# EAGLE board main_improved (EAGLE 9.2.2)
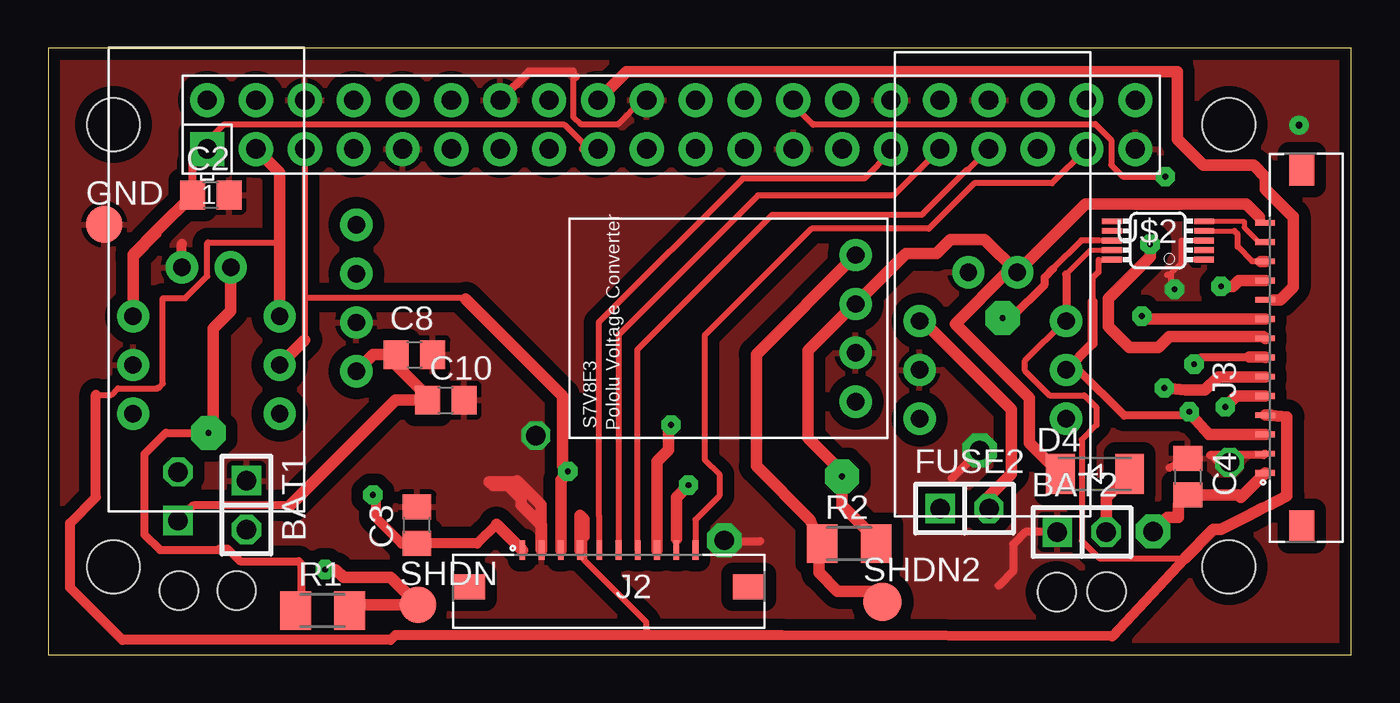
[diagram p0: board, top side]
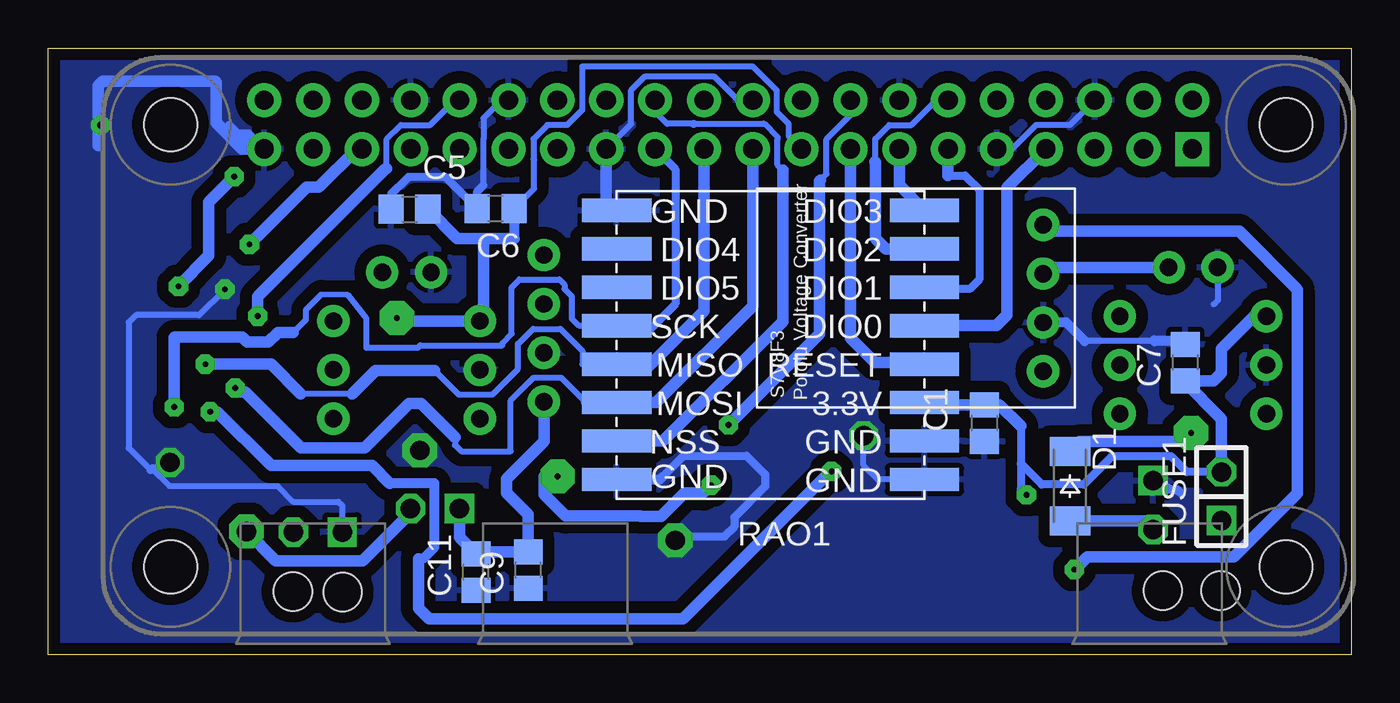
[diagram p1: board, bottom side, seen from below]

Size 67.77 x 31.55 mm. Coordinates in mm from the lower left corner, seen from the top.
Outline: 0,0 67.77,0 67.77,31.55 0,31.55 0,0
Copper layers (1*16): Top 0.035mm / dielectric 1.5mm / Bottom 0.035mm
Design rules "default *": minimum track width 8mil, minimum drill 0.3mm, track to track 8mil, track to pad 8mil, pad to pad 8mil, via to via 8mil, smd to smd 8mil, copper to edge 10mil, drill to drill 8mil, minimum pad ring 10mil, minimum via ring 8mil, stop-mask expansion 4mil, vias tented up to drill 0mil, thermal gap 10mil
Holes 2 mm at 52.45,3.25 55.04,3.28 6.81,3.33 9.8,3.33

## Footprints (pad centres in the part's own frame; a part is rotated, then mirrored left to right if it is on the bottom)
1X02 = drill 1.016 square: 1 -1.27,0 | drill 1.016 octagon: 2 1.27,0
C0805 = smd 1.3 x 1.5: 1 -0.95,0; 2 0.95,0
SOD-123_MINI-SMA = smd 1.5 x 2.1: A 1.8,0; C -1.8,0
TP19R = smd 1.9 x 1.9: TP 0,0
686110183522 = smd 0.3 x 1: 1 -4.5,1.9; 2 -3.5,1.9; 3 -2.5,1.9; 4 -1.5,1.9; 5 -0.5,1.9; 6 0.5,1.9; 7 1.5,1.9; 8 2.5,1.9; 9 3.5,1.9; 10 4.5,1.9 | smd 1.65 x 1.3: Z1 -7.275,0; Z2 7.275,0
686114183522 = smd 0.3 x 1: 1 -6.5,1.9; 2 -5.5,1.9; 3 -4.5,1.9; 4 -3.5,1.9; 5 -2.5,1.9; 6 -1.5,1.9; 7 -0.5,1.9; 8 0.5,1.9; 9 1.5,1.9; 10 2.5,1.9; 11 3.5,1.9; 12 4.5,1.9; 13 5.5,1.9; 14 6.5,1.9 | smd 1.65 x 1.3: Z1 -9.275,0; Z2 9.275,0
M1206 = smd 1.6 x 2: 1 -1.4,0; 2 1.4,0
LORA-RA2-SMD = smd 3.6 x 1.2: 1 -8,7; 2 -8,5; 3 -8,3; 4 -8,1; 5 -8,-1; 6 -8,-3; 7 -8,-5; 8 -8,-7; 9 8,-7; 10 8,-5; 11 8,-3; 12 8,-1; 13 8,1; 14 8,3; 15 8,5; 16 8,7
RASPBERRYPI_BASTELSTUBE_V13_RASPI_BOARD_B+_FULL = drill 1 pad 1.778 square: 1 8.37,25.23 | drill 1 pad 1.778: 2 8.37,27.77; 3 10.91,25.23; 4 10.91,27.77; 5 13.45,25.23; 6 13.45,27.77; 7 15.99,25.23; 8 15.99,27.77; 9 18.53,25.23; 10 18.53,27.77; 11 21.07,25.23; 12 21.07,27.77; 13 23.61,25.23; 14 23.61,27.77; 15 26.15,25.23; 16 26.15,27.77; 17 28.69,25.23; 18 28.69,27.77; 19 31.23,25.23; 20 31.23,27.77; 21 33.77,25.23; 22 33.77,27.77; 23 36.31,25.23; 24 36.31,27.77; 25 38.85,25.23; 26 38.85,27.77; 27 41.39,25.23; 28 41.39,27.77; 29 43.93,25.23; 30 43.93,27.77; 31 46.47,25.23; 32 46.47,27.77; 33 49.01,25.23; 34 49.01,27.77; 35 51.55,25.23; 36 51.55,27.77; 37 54.09,25.23; 38 54.09,27.77; 39 56.63,25.23; 40 56.63,27.77 | hole 2.75: 3.5,3.5; 3.5,26.5; 61.5,3.5; 61.5,26.5
S7V8F3 = drill 0.9 pad 1.676: GND -1.27,-6.35; SHDN 3.81,-6.35; VIN 1.27,-6.35; VOUT -3.81,-6.35
TP20R = smd 2 x 2: TP 0,0
MSOP10_0.5 = smd 0.3 x 1.02: 1 -1,-2.4; 2 -0.5,-2.4; 3 0,-2.4; 4 0.5,-2.4; 5 1,-2.4; 6 1,2.4; 7 0.5,2.4; 8 0,2.4; 9 -0.5,2.4; 10 -1,2.4
BREAKBOARD = drill 0.9 pad 1.676: + 1.27,8.89; - -1.27,8.89; ALT -3.81,1.27; GND -3.81,3.81; QST 3.81,1.27; SCL 3.81,3.81; SDA 3.81,6.35; VCC -3.81,6.35

## Placement (x,y rotation side)
BAT1  [1X02]  10.31,7.77 270 top
BAT2  [1X02]  53.75,6.38 0 top
C1  100nF  [C0805]  19.08,12.04 90 bottom
C2  100nF  [C0805]  8.46,23.9 0 top
C3  100nF  [C0805]  19.18,6.73 90 top
C4  100nF  [C0805]  59.26,9.25 270 top
C5  100nF  [C0805]  48.97,23.16 0 bottom
C6  100nF  [C0805]  44.5,23.19 180 bottom
C7  100nF  [C0805]  8.64,15.19 90 bottom
C8  100 nF  [C0805]  19.05,15.6 0 top
C9  100 nF  [C0805]  42.8,4.39 90 bottom
C10  10 uF  [C0805]  20.68,13.23 0 top
C11  10 uF  [C0805]  45.52,4.29 90 bottom
D1  CGRM4001-G  [SOD-123_MINI-SMA]  14.63,8.76 270 bottom
D4  CGRM4001-G  [SOD-123_MINI-SMA]  54.43,9.4 0 top
FUSE1  [1X02]  6.76,8.23 90 bottom
FUSE2  [1X02]  47.65,7.59 0 top
GND  TPTP19R  [TP19R]  2.92,22.38 0 top
J2  [686110183522]  29.16,3.53 0 top
J3  [686114183522]  65.18,15.95 90 top
R1  4.7k  [M1206]  14.27,2.29 0 top
R2  4.7k  [M1206]  41.66,5.77 0 top
RAO1  LORA-RA-02-433MHZ  [LORA-RA2-SMD]  30.2,16.1 180 bottom
RAO2  RPI-ZERO  [RASPBERRYPI_BASTELSTUBE_V13_RASPI_BOARD_B+_FULL]  -0.1,1.07 0 top
RAO3  S7V8F3  [S7V8F3]  22.38,18.54 90 bottom
RAO4  S7V8F3  [S7V8F3]  35.64,16.97 90 top
SHDN  TPTP19R  [TP19R]  19.23,2.59 0 top
SHDN2  TPTP20R  [TP20R]  43.38,2.74 0 top
U$2  ADS1015IDGT  [MSOP10_0.5]  57.71,21.54 90 top
U$3  POLOLU_FUEL_GAUGEBREAKBOARD  [BREAKBOARD]  8.23,11.25 0 top
U$9  POLOLU_FUEL_GAUGEBREAKBOARD  [BREAKBOARD]  49.12,11 0 top

## Library data of the parts
BAT1 BAT2 FUSE1 FUSE2 = pinhead
C1-C11 = rcl; SPICEPREFIX: C
D1 D4 = diode
GND SHDN SHDN2 = testpad
J2 J3 = Wurth_Elektronik_Electromechanic_FPC_Connectors_&_Flat_Flexible_Cable_rev18c
R1 R2 = rcl; SPICEPREFIX: R
RAO1 = LikeCircuit
RAO2 = RPI-Zero
RAO3 RAO4 = POLOLU-VoltageConverter
U$2 = bt_adc
U$3 U$9 = SparFun-FuelGauge

## Nets
3.3V: C1.2 C2.1 C3.1 C4.2 C5.2 C6.1 C7.1 FUSE1.2 FUSE2.2 J2.1 J3.1 RAO1.3 RAO2.1 RAO2.17 U$2.8 U$3.VCC U$9.VCC
5V0@1: RAO2.2
5V0@2: RAO2.4
A0: J3.12 U$2.4
A1: J3.13 U$2.5
B1: J2.7 RAO2.33
B2: J2.6 RAO2.31
B3: J2.5 RAO2.29
BIN1: BAT1.2 D1.A
BIN2: BAT2.2 D4.A
BUZ: J2.10 RAO2.37
DIO0: RAO1.5 RAO2.7
DIO1: RAO1.6 RAO2.11
DIO2: RAO1.7 RAO2.12
DIO3: RAO1.8 RAO2.13
G1: J3.8 RAO2.35
G2: J3.9 RAO2.32
G3: J3.10 RAO2.18
GND: BAT1.1 BAT2.1 C1.1 C2.2 C3.2 C4.1 C5.1 C6.2 C7.2 C8.2 C9.1 C10.2 C11.1 GND.TP J2.2 J3.2 RAO1.1 RAO1.2 RAO1.9 RAO1.16 RAO2.6 RAO2.9 RAO2.14 RAO2.20 RAO2.25 RAO2.30 RAO2.34 RAO2.39 RAO3.GND RAO4.GND U$2.1 U$2.3 U$3.- U$3.GND U$9.- U$9.GND
LED: J2.8 RAO2.16
MISO: J3.7 RAO1.13 RAO2.21
MOSI: J3.6 RAO1.14 RAO2.19
NSS: RAO1.15 RAO2.24
RESET: RAO1.4 RAO2.15
RX: RAO2.10
SCK: J3.5 RAO1.12 RAO2.23
SCL: J2.3 J3.3 RAO2.5 U$2.10 U$3.SCL U$9.SCL
SDA: J2.4 J3.4 RAO2.3 U$2.9 U$3.SDA U$9.SDA
SHDN: RAO3.SHDN SHDN.TP
SHDN2: RAO4.SHDN SHDN2.TP
SS1: J3.11 RAO2.26
TX: RAO2.8
VIN1: D1.C RAO3.VIN U$3.+
VIN2: D4.C J2.9 J3.14 RAO4.VIN U$9.+
VOUT1: C8.1 C10.1 FUSE1.1 RAO3.VOUT
VOUT2: C9.2 C11.2 FUSE2.1 RAO4.VOUT

## Tracks (layer width: path | path; a pad name or v marks a point on that pad's centre or on a via)
3.3V  (via drill 0.3 pad 1, 0.3 pad 1.78, 1 pad 1.78)
  Top 0.254: U$2.8 54.65,21.54
  Top 0.305: RAO2.1 8.27,26.34 8.27,26.71 9.12,27.56 26.85,27.56 27.81,26.6 27.81,26.3 | 54.65,21.54 53.72,21.54 52.25,20.07
  Top 0.406: 27.81,26.3 RAO2.17 | 5.68,22.08 5.68,21.86 4.42,20.6 | C2.1 7.51,25.58 8.27,26.34 | 52.25,20.07 51.82,19.63 51.82,19.25 50.06,17.5 v49.63,17.5
  Top 0.508: 23.31,6.78 22.31,5.78 C3.1 18.37,5.78 17.02,7.14 17.02,8.18 v16.89,8.3
  Top 0.61: J3.1 62.01,8.18 61.89,8.3 C4.2 58.75,7.79 58.75,7.14 58.19,7.14 v57.45,6.4 | U$9.VCC 45.4,17.43 50.09,12.74 50.09,9.4 48.92,8.23 FUSE2.2 | C2.1 5.68,22.08 4.42,20.81 4.42,20.6 U$3.VCC | 23.31,6.78 J2.1
  Bottom 0.305: RAO2.17 29.26,26.97 29.26,27.61 29.88,28.24 29.88,29.35 31.12,30.59 39.99,30.59 39.99,28.32 40.77,27.54 41.8,27.54 42.53,26.81 42.53,25.78 42.49,25.74 42.49,24.25 C6.1
  Bottom 0.406: 17.2,11.89 17.2,9.93 | 17.2,9.93 17.2,8.61 v16.89,8.3 | FUSE1.2 8.56,9.5 9.37,10.31 12.45,10.31 13.92,8.84 16.1,8.84 17.2,9.93
  Bottom 0.508: C6.1 43.55,21.64
  Bottom 0.61: RAO1.3 22.3,13 21.03,13 21.02,12.99 C1.2 18.3,12.99 17.2,11.89 | v57.45,6.4 55.93,4.88 51.41,4.88 48.81,7.48 FUSE2.2 | FUSE1.2 6.76,12.27 8.68,14.19 C7.1 7.17,14.24 6.76,14.66 6.76,15.9 5.05,17.6 U$3.VCC | 43.55,21.64 45.14,21.64 | 45.14,21.64 46.5,21.64 C5.2 | 45.14,21.64 45.14,17.35 U$9.VCC 49.63,17.35 v49.63,17.5
A0
  Top 0.254: U$2.4 61.68,22.04
  Top 0.305: 63.07,20.45 62.62,20.45 62.61,20.45 61.85,21.21 61.85,21.87 61.68,22.04
  Top 0.61: J3.12 63.07,20.45
A1
  Top 0.254: U$2.5 62.19,22.54 62.19,22.22 62.95,21.45 J3.13
B1
  Top 0.305: J2.7 30.63,5.46 30.63,15.85 37.64,22.86 45.42,22.86 45.49,22.93 47.78,25.22 47.83,25.22 RAO2.33
B2
  Top 0.305: RAO2.31 43.95,23.88 36.91,23.88 29.66,16.63 J2.6
B3
  Top 0.305: RAO2.29 43.83,26.15 42.44,24.76 36.12,24.76 28.63,17.27 28.63,7.24 28.66,7.21 J2.5
BIN1
  Bottom 0.61: BAT1.2 10.77,6.96 D1.A
BIN2
  Top 0.61: BAT2.2 55.02,8.18 D4.A
BUZ
  Top 0.305: J2.10 33.66,7.01 34.9,8.25 34.9,9.37 34.14,10.13 34.14,16.59 39.7,22.15 45.8,22.15 48.16,24.51 52.2,24.51 RAO2.37
DIO0
  Bottom 0.61: RAO2.7 17.91,24.28 17.91,17.65 18.46,17.1 RAO1.5
DIO1
  Bottom 0.406: 20.97,24.92 20.09,24.92 19.35,24.18 19.35,19.51 19.84,19.02 21.34,19.02
  Bottom 0.61: RAO2.11 20.97,24.92 | 21.34,19.02 21.42,19.1 RAO1.6
DIO2
  Bottom 0.305: RAO2.12 21.58,28.84 22.88,27.54 24.02,27.54 24.75,26.81 24.75,25.67
  Bottom 0.406: 24.77,25.65 24.75,25.67
  Bottom 0.61: RAO1.7 24.2,21.1 24.74,21.64 24.74,25.62 24.77,25.65
DIO3
  Bottom 0.61: RAO2.13 23.51,24.41 RAO1.8
G1  (via drill 0.3 pad 1)
  Top 0.61: v57.3,21.34 57.3,20.7 55.12,18.52 55.12,17.07 56.21,15.98 57.73,15.98 58.31,16.55 63.17,16.55 J3.8
  Bottom 0.61: v57.3,21.34 54.33,24.31 53.7,24.31 51.71,26.3 RAO2.35
G2  (via drill 0.3 pad 1)
  Top 0.61: J3.9 56.87,17.45 v56.87,17.6
  Bottom 0.305: RAO2.32 46.6,28.84 47.9,27.54 49.42,27.54 50.15,26.81 50.15,25.28
  Bottom 0.406: 50.17,25.27 50.15,25.28
  Bottom 0.61: v56.87,17.6 56.87,18.62 50.22,25.27 50.17,25.27
G3
  Top 0.254: J3.10 63.7,18.45
  Top 0.61: RAO2.18 30.08,30.33 58.71,30.33 58.71,26.81 60.07,25.45 62.69,25.45 63.3,24.84 63.3,24.21 64.72,22.78 64.74,22.78 64.74,19.13 64.07,18.45 63.7,18.45
GND  (via drill 0.3 pad 1, 0.35 pad 1, 1 pad 1, 1 pad 1.78)
  Top 0.254: U$2.1 59.11,20.54 58.9,20.33 | 58.9,20.33 58.38,19.81 | U$2.3 58.9,21.54 58.9,20.33
  Top 0.305: 58.19,19.76 58.33,19.76 58.38,19.81 58.38,19.2 v58.57,19 | 27.15,30.33 27.31,30.17 27.31,27.97 27.68,27.59 29.62,27.59 30.87,28.84 RAO2.20
  Top 0.406: C4.1 58.31,9.72 | J3.2 63.2,10.37 60.48,10.37 | 60.48,10.37 60.43,10.37 | 27.43,30.05 27.28,30.2 27.28,30.33 27.15,30.33 25,30.33 RAO2.14 | v35.15,5.94 35.1,5.89 37.03,5.89 | 47.93,10.52 48.34,10.52 v48.44,10.62 46.99,9.17 | BAT2.1 50.83,6.38 50.19,5.74 50.19,4.34 49.43,3.58 | 60.48,10.37 60.94,9.91 61.43,9.91 v61.43,9.99
  Top 0.508: U$3.- 6.96,21.36 | 9.41,23.81 C2.2
  Top 0.61: J2.2 25.66,6.73 24.59,7.8 24.59,8.13 23.93,8.79 23.14,8.79 22.94,8.99 24.33,8.99 24.38,9.04 25.63,7.8 25.63,5.46 J2.2
  Bottom 0.305: RAO2.6 14.64,27.54 16.4,27.54 17.65,26.3 RAO2.9 | 10.23,16.31 13.87,16.31 | 45.12,24.41 45.12,26.81 45.14,26.82 45.14,27.89 44.19,28.84 | RAO2.25 37.45,27.59 37.45,29.35 36.72,30.08 33.15,30.08 31.91,28.84 | v58.57,19 59.92,17.65 63.2,17.65 63.58,17.27 63.58,10.74 62.43,9.6 | BAT2.1 52.48,7.75 52.68,7.95 55.02,7.95 55.83,8.76 61.47,8.76 62.37,9.66 | 7.16,18.21 6.93,18.44 6.93,20.12 U$3.- | RAO1.1 24.62,9.1 25.36,9.84 v25.36,11.39
  Bottom 0.406: 57.91,27.1 58.37,27.56 | 57.91,27.1 57.11,26.3 RAO2.39 57.33,27.1 57.91,27.1 | C6.2 45.45,23.89 | 35.84,9.22 34.72,10.34 31.45,10.34 30.48,9.37 30.48,8.74 32.08,7.14 32.08,6.65 32.59,6.15 34.95,6.15 v35.15,5.94 | 44.19,28.84 RAO2.30 | v61.43,9.99 61.74,9.69 62.35,9.69 62.37,9.66 62.43,9.6 | 22.09,9.21 21.95,9.36 | BAT1.1 8.84,8.38 9.04,8.58 9.98,8.58 10.75,9.36 | 45.12,24.41 45.45,24.08 C6.2 | C6.2 47.1,24.84 49.03,24.84 49.92,23.95 C5.1
  Bottom 0.508: C7.2 8.84,16.34 10.26,16.34 10.23,16.31 | RAO3.GND 14.83,17.27 13.87,16.31 | RAO1.16 35.96,9.1 35.84,9.22 | RAO1.1 22.09,9.21
  Bottom 0.61: RAO2.25 38.75,23.65 RAO1.9 | RAO2.39 57.67,26.3 59.03,27.66 59.03,29.77 59.08,29.82 64.92,29.82 65.15,29.59 65.15,27.43 | 65.15,26.47 65.15,27.43 | 65.15,27.43 v65.05,27.53
  pour Top (isolate 0.61): -30.43,-15.65 -32.72,-17.93 94.89,-17.93 98.02,-14.81 98.02,49.86 98.25,50.09 -27.74,50.09 -29.59,48.23 -29.59,45.92 -30.43,45.11 -30.48,45.16 -30.48,45.14
  pour Bottom (isolate 0.61): -28.98,45.36 -28.98,-15.62 -27.3,-17.3 98.65,-17.3 99.06,-16.89 99.26,-16.69 99.26,48.92 -25.22,48.92 -27.3,46.84 -28.78,45.36 -28.98,45.42 -29.01,45.39
LED  (via drill 0.3 pad 1)
  Top 0.61: J2.8 31.66,10.04 32.26,10.64 32.26,11.81 v32.39,11.94
  Bottom 0.305: 27.61,24.69 27.29,25.01 27.29,26.81 26.38,27.73 26.05,28.06 RAO2.16
  Bottom 0.61: v32.39,11.94 27.66,16.66 27.66,24.64 27.61,24.69
MISO  (via drill 0.3 pad 1)
  Top 0.406: v59.59,15.1 59.95,15.47 62.46,15.47
  Top 0.61: 62.46,15.47 63.26,15.47 J3.7
  Bottom 0.305: 51.97,13.56 54.64,13.56 | RAO1.13 39.98,15.1 39.98,15.8 41.12,16.94 42.55,16.94 43.33,16.15 43.33,14.86 44.68,13.51 46.41,13.51 47.68,14.78
  Bottom 0.61: RAO2.21 33.67,17.87 36.75,14.78 37.07,15.1 RAO1.13 | v59.59,15.1 56.18,15.1 54.64,13.56 | 51.97,13.56 50.75,14.78 47.68,14.78
MOSI  (via drill 0.3 pad 1)
  Top 0.61: J3.6 60.84,14.45 60.15,13.76 59.16,13.76 v58.04,13.87
  Bottom 0.305: RAO1.14 39.9,13.1 39.9,13.21 41.1,14.4 42.52,14.4 43.71,13.21 43.71,10.57 46.28,10.57 46.61,10.9 46.61,11.3
  Bottom 0.61: RAO2.19 31.13,18.14 36.16,13.11 38.05,13.11 38.05,13.1 RAO1.14 | v58.04,13.87 57.84,13.66 57.52,13.66 54.6,10.74 51.32,10.74 49.01,13.06 48.36,13.06 46.61,11.3
NSS
  Bottom 0.305: 29.57,25.2 29.83,25.46 29.83,26.81 29.82,26.83 29.82,26.9 30.53,27.61 30.6,27.61 30.61,27.59 34.18,27.59 | 34.2,27.61 35.59,27.61 36.21,28.23
  Bottom 0.406: 34.18,27.59 34.2,27.61 | 36.21,28.23 RAO2.24
  Bottom 0.61: RAO1.15 35.78,11.1 29.57,17.32 29.57,25.2
RESET
  Bottom 0.61: RAO1.4 22.29,15.19 22.81,15.19 24.77,15.19 26.05,16.47 RAO2.15
SCK  (via drill 0.3 pad 1)
  Top 0.61: v61.21,12.88 61.79,13.45 J3.5
  Bottom 0.305: 55.02,16.76 54.36,17.42 54.36,17.94 53.58,18.72 52.17,18.7 51.21,17.49 51.21,15.95 48.55,15.95 48.42,16.08 44.15,16.08 44.15,16.2 43.66,16.69 43.66,19.1 43.26,19.51 41.17,19.51 40.92,19.25 40.92,19.02 40.54,18.64 40.54,17.47 40.18,17.12 38.22,17.12 RAO1.12
  Bottom 0.406: RAO2.23 35.15,25.24 35.15,18.24 36.47,16.92 36.65,16.92
  Bottom 0.61: 36.65,16.92 36.84,17.1 RAO1.12 | v61.21,12.88 61.21,16.48 61.19,16.51 57.68,16.51 57.43,16.26 56.31,16.26 55.81,16.76 55.02,16.76
SCL  (via drill 0.3 pad 1)
  Top 0.254: 54.61,20.52 55.29,20.52 U$2.10
  Top 0.305: RAO2.5 13.35,18.57 | 13.35,18.57 13.35,16.37 | 54.61,20.52 54.61,19.89 54.31,19.58 54.31,18.34 | 13.35,18.57 21.64,18.57 21.72,18.49
  Top 0.406: U$9.SCL 53.57,14.81 55.95,12.43 59.13,12.43 v59.33,12.63
  Top 0.508: 54.31,18.34 54.31,16.18 U$9.SCL
  Top 0.61: 13.35,16.37 U$3.SCL | J2.3 26.66,9.08 27.03,9.45 v27.03,9.52 26.75,9.8 26.75,13.46 21.72,18.49 | v59.33,12.63 59.33,12.57 59.5,12.4 60.35,11.45 J3.3
  Bottom 0.508: 48.51,4.99 48.28,4.99 47.68,5.59 47.68,8.92 50.01,8.92
  Bottom 0.61: v27.03,9.52 27.08,9.52 34.75,1.85 47.96,1.85 48.51,2.41 48.51,4.99 | v59.33,12.63 58.98,12.63 56.18,9.83 50.93,9.83 50.01,8.92
SDA
  Top 0.254: U$2.9 55.29,21.02 54.17,21.02 52.93,19.79
  Top 0.305: J2.4 27.86,5.23 | 27.86,5.23 27.86,4.93 31.1,1.69 31.1,1.3 31.39,1.01 | 27.86,6.15 27.86,5.23 | 59.1,5.01 54.66,5.01 53.75,5.92 53.75,11.18 54.51,11.94 54.51,12.85 53.87,13.49 52.07,13.49 50.8,14.76 50.8,15.29 52.86,17.35 U$9.SDA | 2.49,13.51 3.3,13.51 3.63,13.84 5.72,13.84 | 5.72,13.84 5.69,13.87 | 5.72,13.84 5.97,14.1 5.97,18.54 7.14,18.54 8.28,19.68 8.28,21.41 8.31,21.44 12.01,21.44 12.04,21.46
  Top 0.406: 52.93,19.79 U$9.SDA
  Top 0.508: 59.1,5.01 55.33,0.94 38.16,1.01 31.39,1.01 18.05,1.01 17.81,0.76 3.86,0.76 1.14,3.48 1.14,6.83 2.49,8.18 2.49,13.51
  Top 0.61: RAO2.3 12.04,25.07 12.04,21.46 U$3.SDA | J2.4 27.66,6.15 | 27.66,6.15 27.66,7.24 27.86,7.03 27.86,6.15 27.66,6.15 | 59.1,5.01 60.6,6.5 60.99,6.5 62.38,7.21 63.12,7.59 63.41,7.74 64.41,8.25 64.41,12.37 63.6,12.43 | 63.6,12.43 J3.4 63.58,12.45 63.6,12.43
SHDN  (via drill 0.3 pad 1)
  Top 0.61: v14.4,4.42 14.96,4.42 15.37,4.01 17.81,4.01 SHDN.TP 16.51,2.59
  Bottom 0.61: RAO3.SHDN 15.7,22.02 5.84,22.02 2.82,19 2.82,8.38 6.12,5.08 13.74,5.08 v14.4,4.42
SHDN2
  Top 0.61: RAO4.SHDN 36.83,15.62 36.83,9.8 39.62,7.02 40.08,5.92 40.08,4.27 41.05,3.3 43.38,3.3 SHDN2.TP
SS1  (via drill 0.3 pad 1)
  Top 0.305: v58.09,24.87 55.88,24.87 55.28,25.46 55.28,26.76 54.45,27.59 39.81,27.59 39.78,27.56 38.75,28.59 RAO2.26
  Top 0.61: v60.99,19.15 61.6,19.15 61.9,19.46 62.64,19.46 J3.11
  Bottom 0.61: v58.09,24.87 59.41,23.55 59.41,20.75 60.99,19.18 v60.99,19.15
VIN1  (via drill 0.3 pad 1.78)
  Top 0.406: 13.16,2.08 13.16,4.72 13.03,4.85 9.98,4.85 9.32,5.51 8.92,5.51 8.99,5.44 5.82,5.44 5,6.25 5,10.41 6.12,11.53 v8.33,11.53
  Top 0.61: v8.33,11.53 8.59,11.79 8.59,16.97 9.5,17.88 U$3.+
  Bottom 0.61: D1.C 14.12,11.07 8.66,11.07 8.59,11.15 8.59,11.18 8.33,11.43 v8.33,11.53 | U$3.+ 15.7,20.14 RAO3.VIN
VIN2  (via drill 0.3 pad 1, 0.3 pad 1.78)
  Top 0.254: 62.97,22.76 J3.14 | J2.9 32.66,6.01 32.66,6.02
  Top 0.406: v41.28,9.27 41.38,9.37 41.38,9.4
  Top 0.61: D4.C 51.03,11 51.03,13.33 47.17,17.2 49.86,19.89 U$9.+ | 62.97,22.76 62.31,23.42 53.92,23.42 U$9.+ | v33.3,8.81 32.66,8.18 32.66,6.02 | 41.38,9.4 39.52,11.28 39.52,15.83 41.99,18.29 | U$9.+ 48.69,21.59 46.91,21.59 46.18,20.85 44.6,20.85 42.04,18.29 41.99,18.29 | RAO4.VIN 41.99,18.29 | v41.28,9.27 41.28,7.75 42.44,6.58
  Bottom 0.61: v33.3,8.81 33.71,8.41 34.67,8.41 35.89,7.19 36.96,7.19 36.98,7.21 40.87,7.21 41.99,8.33 41.99,9.27 v41.28,9.27
VOUT1
  Top 0.406: 12.59,7.75 7.54,7.75 FUSE1.1
  Top 0.61: RAO3.VOUT 16.89,15.6 C8.1 18.1,15.06 19.73,13.44 C10.1 18.07,13.23 12.59,7.75
VOUT2
  Bottom 0.61: FUSE2.1 46.38,6.11 C11.2 45.42,5.34 C9.2 42.8,7.29 43.92,8.41 43.92,9.14 41.99,11.07 RAO4.VOUT